# Altium PCB roTDSP.PcbDoc (part 2 of 2)
Units mm, origin at the board's own origin, x right, y up, seen from the top; angles counter-clockwise.
Board outline 100.2 x 100 mm, 2 copper layers (Top Layer, Bottom Layer); 148 components, 98 nets, 431 pads, 651 vias.
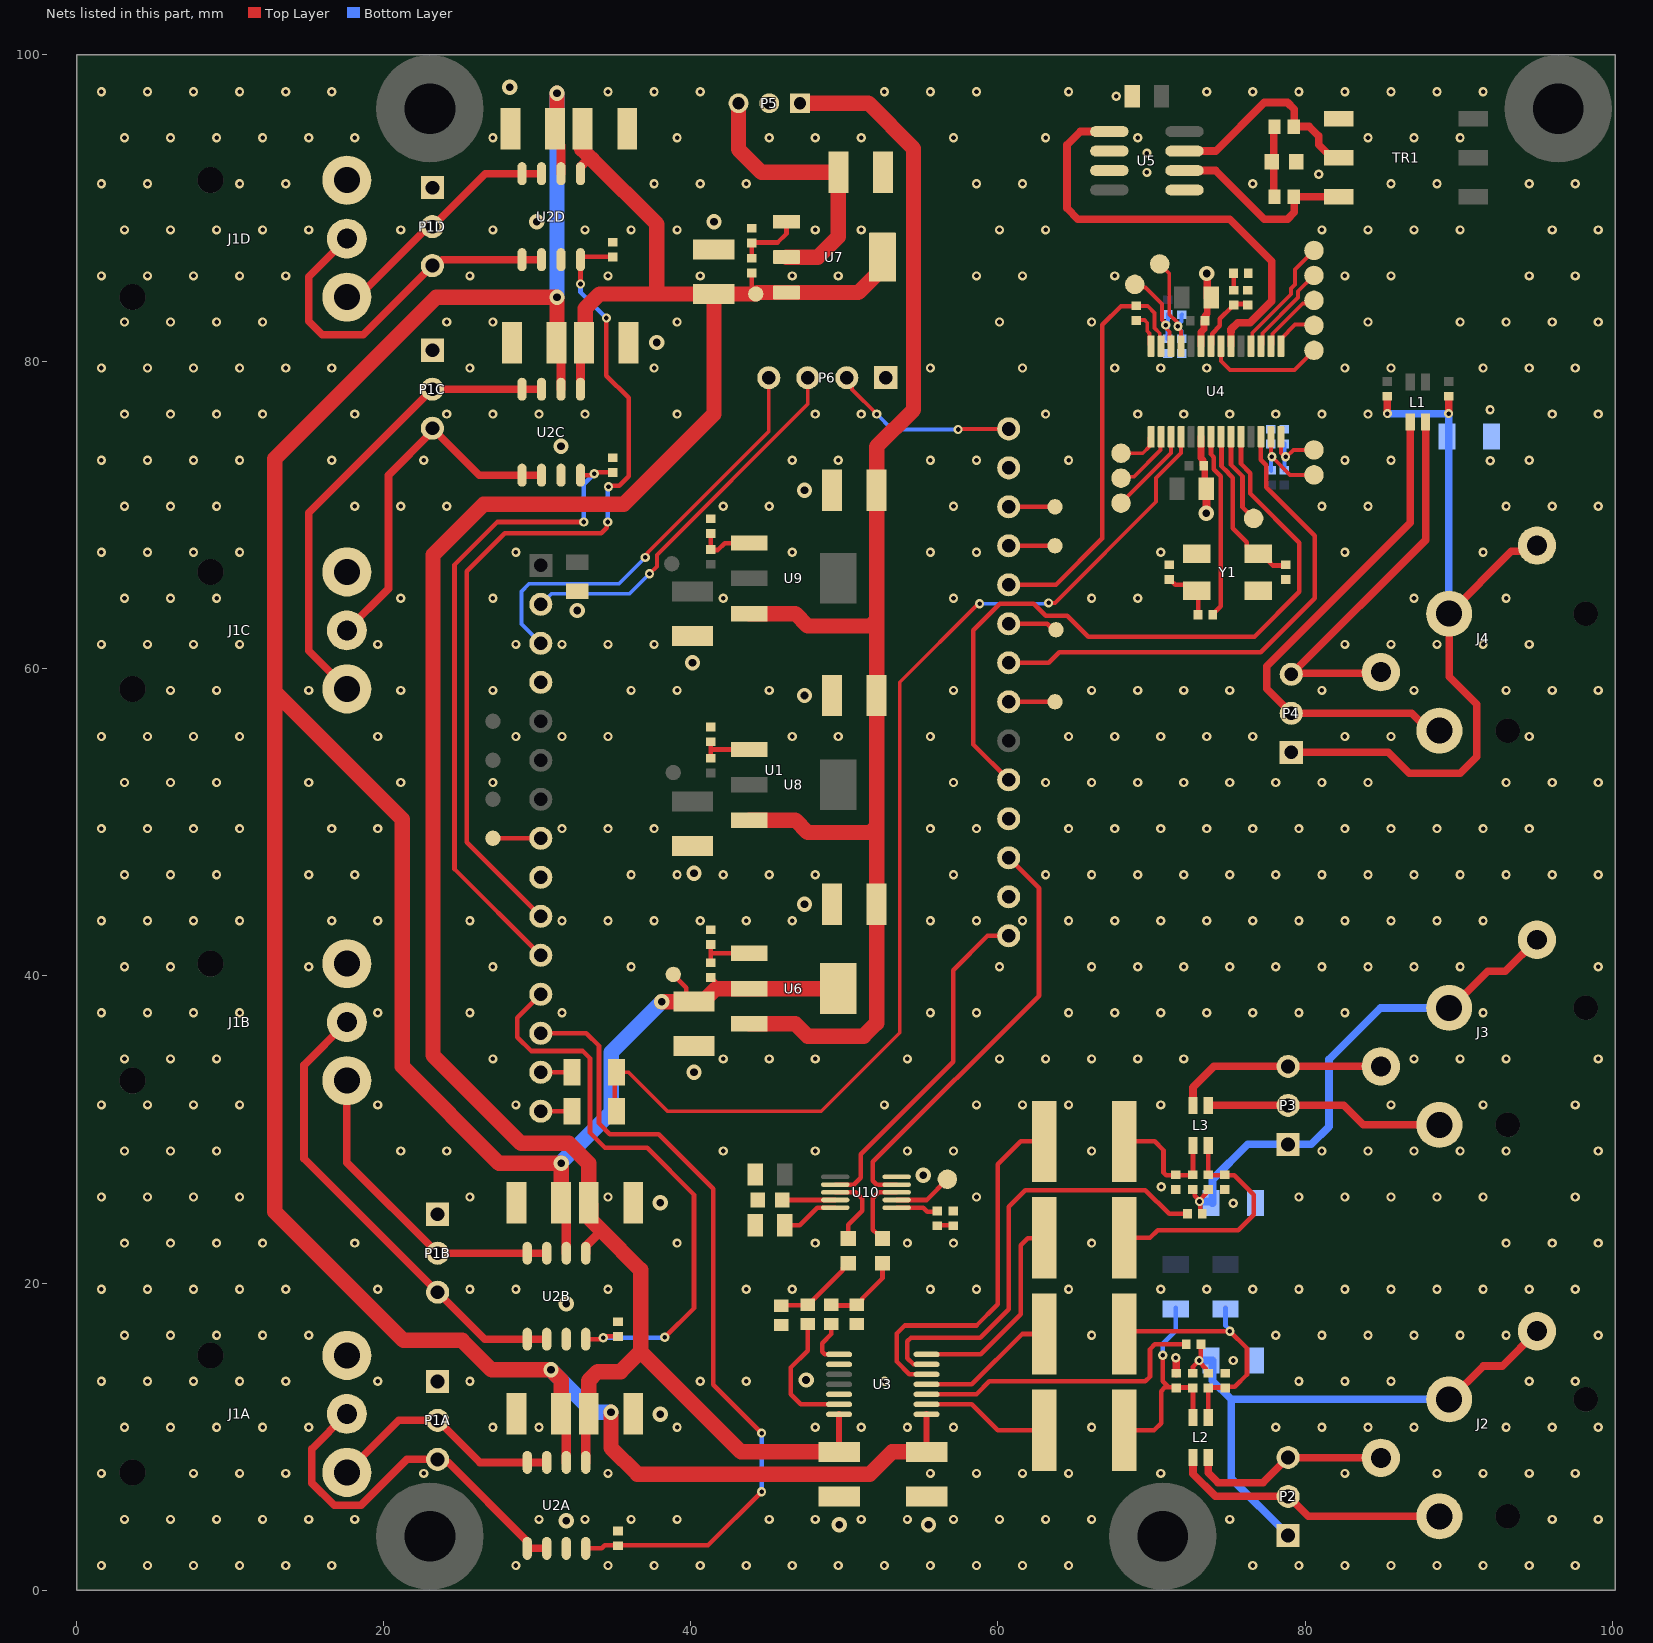
[diagram p2: the nets of this part, all layers, seen from the top]

## Via types
v1: diameter 0.6, hole 0.3, Top Layer to Bottom Layer, tented both sides, 613 vias
v2: diameter 1, hole 0.5, Top Layer to Bottom Layer, tented both sides, 38 vias

## Nets (pads, with @x,y where several pads share a name; then routed paths per layer and width w, separated by ;. In a path a pad name is that pad's centre, name@x,y a point inside that pad or via, vN(x,y) a via of type N, cw(c..) or ccw(c..) an arc to the next point about the centre after c; other vN are vias at no path point) (continued)
FMT0: R20.2 R21.1 TP3.1 U4.25 | length 7.8
  Top Layer w0.254: TP3.1@70.536,86.381 71.154,85.763 71.154,83.097 71.652,82.598 71.652,82.295 71.929,82.018 U4.25@71.929,81.03
  Bottom Layer w0.254: R21.1@71.959,81.471 71.959,82.013 71.718,82.255 v1(71.718,82.322) 71.718,82.416 71.943,82.641 71.943,83.068 R20.2@71.974,83.098
FMT1: R22.2 R23.1 TP4.1 U4.26 | length 7
  Top Layer w0.254: TP4.1@68.91,85.05 69.104,84.855 69.603,84.855 70.679,83.78 70.679,82.719 70.922,82.476 70.922,82.225 71.181,81.966 71.181,81.128 U4.26@71.279,81.03
  Bottom Layer w0.254: v1(70.922,82.397) 70.922,82.318 71.054,82.187 R23.1@71.054,81.48 ; v1@70.984,82.388 70.984,82.615 71.072,82.703 71.072,83.112 R22.2@71.068,83.115
GND: C1.1 C2A.1 C2B.1 C2C.1 C2D.1 C3A.1 C3B.1 C3C.1 C3D.1 C4.1 C7.1 C10.1 C11.1 C12.1 C13.1 C14.1 C15.1 C16.2 C17.2 C20.1 C21.1 C22.1 C23.1 C24.1 C25.1 C26.1 C27.1 C28.2 C29.1 C30.1 C31.1 C32.1 C33.1 C34.2 C35.1 C38.1 J1A.1 J1B.1 J1C.1 J1D.1 P1A.1 P1B.1 P1C.1 P1D.1 P5.2 P6.1 R1A.1 R1B.1 R1C.1 R1D.1 R4.1 R8.1 R15.1 R21.2 R23.2 R25.2 R27.2 R29.1 R31.1 R33.2 R35.2 R36.2 R39.1 R41.1 TR1.4 U1.4 U1.9 U1.17 U1.19 U1.28 U2A.3 U2B.3 U2C.3 U2D.3 U3.9 U3.12 U4.6 U4.23 U5.2 U5.3 U5.5 U10.10 Y1.2 Y1.4 | length 10.8
  Top Layer w0.45: U4.6@73.229,75.13 73.229,73.74 73.351,73.618 73.351,73.3 C16.2@73.411,73.24 ; U4.23@73.229,81.03 73.229,81.757 73.23,81.759 73.23,81.936 73.424,82.129 73.424,82.67 C17.2@73.444,82.69 ; C16.2@73.391,73.24 73.471,73.16 73.471,72.348 73.604,72.215 C15.1@73.604,71.74 ; 73.484,83 73.631,83.147 C14.1@73.631,84.19
  Top Layer w0.5: v1(71.581,15.131) 71.581,15.104 71.619,15.065 C23.1@71.619,14.12 C23.1@71.619,14.08 ; v2(73.558,70.152) 73.558,70.502 73.585,70.529 C15.1@73.585,71.722 ; v2(73.604,85.761) 73.604,85.411 73.631,85.384 C14.1@73.631,84.19
  other v1: 1.6,1.6 4.6,1.6 7.6,1.6 10.6,1.6 13.6,1.6 16.6,1.6 28.6,1.6 34.6,1.6 37.6,1.6 40.6,1.6 43.6,1.6 46.6,1.6 49.6,1.6 52.6,1.6 55.6,1.6 58.6,1.6 61.6,1.6 64.6,1.6 76.6,1.6 79.6,1.6 82.6,1.6 85.6,1.6 88.6,1.6 91.6,1.6 94.6,1.6 97.6,1.6 3.1,4.6 6.1,4.6 9.1,4.6 12.1,4.6 15.1,4.6 18.1,4.6 30.1,4.6 33.1,4.6 36.1,4.6 39.1,4.6 45.1,4.6 48.1,4.6 51.1,4.6 54.1,4.6 57.1,4.6 60.1,4.6 63.1,4.6 66.1,4.6 75.1,4.6 96.1,4.6 99.1,4.6 1.6,7.6 7.6,7.6 10.6,7.6 13.6,7.6 22.6,7.6 34.6,7.6 55.6,7.6 58.6,7.6 61.6,7.6 64.6,7.6 70.6,7.6 82.6,7.6 88.6,7.6 91.6,7.6 94.6,7.6 97.6,7.6 3.1,10.6 6.1,10.6 9.1,10.6 12.1,10.6 15.1,10.6 27.1,10.6 30.1,10.6 39.1,10.6 48.1,10.6 51.1,10.6 54.1,10.6 57.1,10.6 66.1,10.6 78.1,10.6 81.1,10.6 84.1,10.6 87.1,10.6 93.1,10.6 96.1,10.6 99.1,10.6 1.6,13.6 4.6,13.6 7.6,13.6 10.6,13.6 13.6,13.6 19.6,13.6 25.6,13.6 40.6,13.6 43.6,13.6 52.6,13.6 79.6,13.6 82.6,13.6 85.6,13.6 94.6,13.6 97.6,13.6 75.319,14.95 3.1,16.6 6.1,16.6 9.1,16.6 12.1,16.6 15.1,16.6 66.1,16.6 78.1,16.6 81.1,16.6 84.1,16.6 87.1,16.6 90.1,16.6 93.1,16.6 99.1,16.6 1.6,19.6 4.6,19.6 7.6,19.6 10.6,19.6 13.6,19.6 19.6,19.6 25.6,19.6 28.6,19.6 34.6,19.6 43.6,19.6 46.6,19.6 55.6,19.6 58.6,19.6 64.6,19.6 70.6,19.6 73.6,19.6 76.6,19.6 79.6,19.6 82.6,19.6 85.6,19.6 88.6,19.6 91.6,19.6 94.6,19.6 97.6,19.6 3.1,22.6 6.1,22.6 9.1,22.6 12.1,22.6 18.1,22.6 39.1,22.6 48.1,22.6 54.1,22.6 57.1,22.6 66.1,22.6 93.1,22.6 96.1,22.6 99.1,22.6 75.319,25.201 1.6,25.6 4.6,25.6 7.6,25.6 10.6,25.6 25.6,25.6 34.6,25.6 58.6,25.6 79.6,25.6 82.6,25.6 85.6,25.6 88.6,25.6 91.6,25.6 97.6,25.6 70.631,26.27 3.1,28.6 6.1,28.6 9.1,28.6 21.1,28.6 24.1,28.6 42.1,28.6 48.1,28.6 54.1,28.6 57.1,28.6 66.1,28.6 81.1,28.6 84.1,28.6 87.1,28.6 90.1,28.6 93.1,28.6 99.1,28.6 1.6,31.6 4.6,31.6 7.6,31.6 10.6,31.6 19.6,31.6 28.6,31.6 52.6,31.6 58.6,31.6 61.6,31.6 64.6,31.6 70.6,31.6 85.6,31.6 91.6,31.6 97.6,31.6 3.1,34.6 6.1,34.6 9.1,34.6 27.1,34.6 42.1,34.6 45.1,34.6 48.1,34.6 54.1,34.6 60.1,34.6 63.1,34.6 66.1,34.6 69.1,34.6 72.1,34.6 87.1,34.6 90.1,34.6 93.1,34.6 99.1,34.6 1.6,37.6 4.6,37.6 7.6,37.6 10.6,37.6 19.6,37.6 25.6,37.6 31.6,37.6 55.6,37.6 58.6,37.6 64.6,37.6 67.6,37.6 70.6,37.6 73.6,37.6 76.6,37.6 79.6,37.6 82.6,37.6 91.6,37.6 3.1,40.6 6.1,40.6 15.1,40.6 27.1,40.6 36.1,40.6 60.1,40.6 66.1,40.6 69.1,40.6 72.1,40.6 75.1,40.6 78.1,40.6 81.1,40.6 84.1,40.6 87.1,40.6 90.1,40.6 99.1,40.6 1.6,43.6 4.6,43.6 7.6,43.6 10.6,43.6 16.6,43.6 19.6,43.6 25.6,43.6 31.6,43.6 34.6,43.6 37.6,43.6 40.6,43.6 43.6,43.6 46.6,43.6 55.6,43.6 58.6,43.6 61.6,43.6 64.6,43.6 67.6,43.6 70.6,43.6 73.6,43.6 76.6,43.6 79.6,43.6 82.6,43.6 85.6,43.6 88.6,43.6 91.6,43.6 3.1,46.6 6.1,46.6 9.1,46.6 15.1,46.6 18.1,46.6 36.1,46.6 39.1,46.6 42.1,46.6 45.1,46.6 48.1,46.6 57.1,46.6 63.1,46.6 66.1,46.6 69.1,46.6 72.1,46.6 75.1,46.6 78.1,46.6 81.1,46.6 84.1,46.6 87.1,46.6 90.1,46.6 93.1,46.6 96.1,46.6 99.1,46.6 1.6,49.6 4.6,49.6 7.6,49.6 10.6,49.6 16.6,49.6 19.6,49.6 31.6,49.6 34.6,49.6 37.6,49.6 55.6,49.6 58.6,49.6 64.6,49.6 67.6,49.6 70.6,49.6 73.6,49.6 76.6,49.6 79.6,49.6 82.6,49.6 85.6,49.6 88.6,49.6 91.6,49.6 94.6,49.6 3.1,52.6 6.1,52.6 9.1,52.6 15.1,52.6 21.1,52.6 27.1,52.6 57.1,52.6 63.1,52.6 66.1,52.6 69.1,52.6 72.1,52.6 75.1,52.6 78.1,52.6 81.1,52.6 84.1,52.6 93.1,52.6 96.1,52.6 99.1,52.6 1.6,55.6 4.6,55.6 7.6,55.6 10.6,55.6 19.6,55.6 28.6,55.6 31.6,55.6 34.6,55.6 46.6,55.6 49.6,55.6 55.6,55.6 64.6,55.6 67.6,55.6 70.6,55.6 73.6,55.6 76.6,55.6 82.6,55.6 85.6,55.6 94.6,55.6 6.1,58.6 9.1,58.6 15.1,58.6 21.1,58.6 27.1,58.6 36.1,58.6 39.1,58.6 45.1,58.6 57.1,58.6 66.1,58.6 69.1,58.6 72.1,58.6 75.1,58.6 81.1,58.6 87.1,58.6 93.1,58.6 96.1,58.6 99.1,58.6 1.6,61.6 4.6,61.6 7.6,61.6 10.6,61.6 19.6,61.6 28.6,61.6 31.6,61.6 34.6,61.6 37.6,61.6 82.6,61.6 85.6,61.6 88.6,61.6 91.6,61.6 94.6,61.6 3.1,64.6 6.1,64.6 9.1,64.6 21.1,64.6 27.1,64.6 42.1,64.6 57.1,64.6 66.1,64.6 69.1,64.6 87.1,64.6 93.1,64.6 1.6,67.6 4.6,67.6 7.6,67.6 10.6,67.6 28.6,67.6 46.6,67.6 55.6,67.6 58.6,67.6 70.6,67.6 82.6,67.6 91.6,67.6 3.1,70.6 6.1,70.6 9.1,70.6 18.1,70.6 21.1,70.6 24.1,70.6 42.1,70.6 45.1,70.6 57.1,70.6 81.1,70.6 84.1,70.6 93.1,70.6 96.1,70.6 99.1,70.6 92.06,73.56 1.6,73.6 4.6,73.6 7.6,73.6 10.6,73.6 16.6,73.6 22.6,73.6 46.6,73.6 49.6,73.6 55.6,73.6 58.6,73.6 64.6,73.6 82.6,73.6 85.6,73.6 94.6,73.6 3.1,76.6 6.1,76.6 9.1,76.6 12.1,76.6 18.1,76.6 24.1,76.6 27.1,76.6 30.1,76.6 33.1,76.6 39.1,76.6 48.1,76.6 51.1,76.6 63.1,76.6 69.1,76.6 72.1,76.6 75.1,76.6 78.1,76.6 81.1,76.6 84.1,76.6 96.1,76.6 99.1,76.6 92.055,76.88 1.6,79.6 4.6,79.6 7.6,79.6 10.6,79.6 13.6,79.6 16.6,79.6 25.6,79.6 37.6,79.6 55.6,79.6 61.6,79.6 67.6,79.6 70.6,79.6 73.6,79.6 82.6,79.6 85.6,79.6 91.6,79.6 94.6,79.6 97.6,79.6 3.1,82.6 6.1,82.6 9.1,82.6 12.1,82.6 24.1,82.6 27.1,82.6 39.1,82.6 60.1,82.6 66.1,82.6 84.1,82.6 90.1,82.6 93.1,82.6 96.1,82.6 99.1,82.6 1.6,85.6 4.6,85.6 7.6,85.6 10.6,85.6 13.6,85.6 25.6,85.6 34.6,85.6 40.6,85.6 46.6,85.6 49.6,85.6 58.6,85.6 61.6,85.6 67.6,85.6 82.6,85.6 85.6,85.6 94.6,85.6 97.6,85.6 3.1,88.6 6.1,88.6 9.1,88.6 12.1,88.6 15.1,88.6 21.1,88.6 27.1,88.6 33.1,88.6 36.1,88.6 39.1,88.6 48.1,88.6 51.1,88.6 60.1,88.6 63.1,88.6 81.1,88.6 84.1,88.6 87.1,88.6 90.1,88.6 96.1,88.6 99.1,88.6 1.6,91.6 4.6,91.6 10.6,91.6 13.6,91.6 37.6,91.6 40.6,91.6 43.6,91.6 58.6,91.6 61.6,91.6 76.6,91.6 85.6,91.6 88.6,91.6 94.6,91.6 97.6,91.6 80.9,92.218 69.7,92.345 69.7,93.6 3.1,94.6 6.1,94.6 9.1,94.6 12.1,94.6 15.1,94.6 18.1,94.6 27.1,94.6 39.1,94.6 45.1,94.6 48.1,94.6 51.1,94.6 57.1,94.6 63.1,94.6 69.1,94.6 84.1,94.6 87.1,94.6 90.1,94.6 67.7,97.3 1.6,97.6 4.6,97.6 7.6,97.6 10.6,97.6 13.6,97.6 16.6,97.6 34.6,97.6 37.6,97.6 40.6,97.6 52.6,97.6 55.6,97.6 58.6,97.6 64.6,97.6 73.6,97.6 76.6,97.6 79.6,97.6 82.6,97.6 85.6,97.6 88.6,97.6 91.6,97.6
  other v2: 49.65,4.264 55.475,4.264 31.878,4.509 38,11.45 47.5,13.683 31.878,18.64 38,25.23 55.14,27.02 40.2,33.73 47.4,44.68 40.2,46.7 47.4,58.27 40.1,60.4 32.593,63.809 47.4,71.645 31.535,74.516 37.778,81.26 29.965,89.125 41.5,89.125 28.2,97.9
GPIO_1: TP14.1 U1.22 | length 3
  Top Layer w0.3: U1.22@60.7,57.86 TP14.1@63.714,57.86
GPIO_6: R10.2 U1.25 U4.27 | length 27.7
  Top Layer w0.254: R10.2@69,83.635 69.754,83.635 70.2,83.188 70.2,82.2 70.536,81.864 70.536,81.123 U4.27@70.629,81.03
  Top Layer w0.3: U1.25@60.7,65.48 63.78,65.48 66.8,68.5 66.8,82.421 68.014,83.635 R10.2@69,83.635
GPIO_7: TP17.1 U1.24 | length 3.2
  Top Layer w0.3: U1.24@60.7,62.94 63.2,62.94 63.59,62.55 TP17.1@63.78,62.55
GPIO_10: TP20.1 U1.26 | length 3
  Top Layer w0.3: U1.26@60.7,68.02 TP20.1@63.714,68.02
GPIO_11: TP21.1 U1.27 | length 3
  Top Layer w0.3: U1.27@60.7,70.56 TP21.1@63.714,70.56
Line_N: C6.1 C22.2 L2.4 R5.2 R17.1 | length 16.7
  Top Layer w0.3: C6.1@68.225,16.678 68.407,16.86 v1(75.109,16.86) 76.219,15.75 76.219,14.04 75.414,13.234 74.854,13.234 74.814,13.195 73.705,13.195 73.7,13.19 L2.4@73.7,11.24
  Bottom Layer w0.3: R17.1@74.819,18.4 74.819,17.231 75.109,16.941 v1(75.109,16.86)
Line_P: C5.1 C23.2 L2.3 R2.1 R16.1 | length 14.5
  Top Layer w0.3: C5.1@68.225,10.405 70.165,10.405 70.631,10.871 70.631,12.955 70.875,13.2 71.119,13.2 ; v1(70.731,15.296) 70.731,13.589 71.119,13.2 ; L2.3@72.7,11.24 72.7,13.19 72.695,13.195 71.624,13.195 71.619,13.2 71.119,13.2
  Bottom Layer w0.3: v1(70.731,15.296) 70.731,16.033 71.581,16.883 R16.1@71.581,18.4
LRCLK_in: U1.20 U4.10 | length 46.4
  Top Layer w0.3: U1.20@60.7,52.78 58.4,55.08 58.4,62.528 60.122,64.25 62.33,64.25 63.109,63.47 64.52,63.47 65.89,62.1 76.712,62.1 79.635,65.023 79.635,68.222 76.429,71.428 76.429,72.757 75.829,73.357 U4.10@75.829,75.13
NetC5_2: C5.2 U3.2 | length 8.4
  Top Layer w0.3: U3.2@55.35,12.1 58.3,12.1 59.995,10.405 C5.2@63.025,10.405
NetC6_2: C6.2 U3.4 | length 9
  Top Layer w0.3: U3.4@55.35,13.4 58.3,13.4 61.578,16.678 C6.2@63.025,16.678
NetC8_1: C8.1 C25.2 L3.3 R6.1 | length 15.8
  Top Layer w0.3: C8.1@68.225,22.95 69.9,22.95 70.4,23.45 75.66,23.45 76.669,24.459 76.669,25.742 75.401,27.01 74.781,27.01 74.776,27.015 73.705,27.015 73.7,27.02 L3.3@73.7,28.97
NetC8_2: C8.2 U3.7 | length 13.5
  Top Layer w0.3: U3.7@55.35,15.35 58.872,15.35 61.483,17.96 61.483,22.45 61.951,22.918 62.993,22.918 C8.2@63.025,22.95
NetC9_1: C9.1 C24.2 L3.4 R9.2 | length 8.2
  Top Layer w0.3: C9.1@68.225,29.222 70.208,29.222 70.781,28.65 70.781,27.186 70.956,27.01 71.581,27.01 71.586,27.015 72.695,27.015 72.7,27.02 L3.4@72.7,28.97
NetC9_2: C9.2 U3.5 | length 24.3
  Top Layer w0.3: U3.5@55.35,14.05 55.34,14.06 54.23,14.06 53.4,14.89 53.4,16.715 53.917,17.231 58.604,17.231 59.995,18.622 59.995,27.734 61.483,29.222 C9.2@63.025,29.222
NetC10_2: C10.2 U4.8 Y1.1 | length 11
  Top Layer w0.3: U4.8@74.529,75.13 74.561,75.098 74.561,73.21 75.004,72.767 75.004,72.758 75.304,72.458 75.304,69.154 76.207,68.25 76.207,67.95 76.657,67.5 77.257,67.5 77.632,67.125 77.632,67.004 77.896,66.74 C10.2@78.757,66.74
NetC11_2: C11.2 R11.1 Y1.3 | length 3.7
  Top Layer w0.3: C11.2@71.157,65.86 71.157,65.84 71.252,65.745 71.272,65.745 71.542,65.475 72.582,65.475 Y1.3@72.957,65.1 73.057,65 R11.1@73.057,63.541
NetC12_2: C12.2 R12.1 | length 1.2
  Top Layer w0.3: C12.2@75.328,85.781 75.348,85.761 75.348,84.66 R12.1@75.368,84.64
NetC13_2: C13.2 R12.2 U4.22 | length 4.2
  Top Layer w0.3: U4.22@73.879,81.03 73.954,81.105 73.954,81.846 74.457,82.35 74.457,82.799 75.208,83.55 75.208,83.575 75.343,83.71 R12.2@75.368,83.71 75.368,83.74 75.398,83.77 C13.2@76.238,83.77
NetC18_1: C18.1 C19.1 J4.1 J4.G P4.1 R15.2 | length 50.1
  Top Layer w0.5: P4.1@79.104,54.57 85.43,54.57 86.8,53.2 90.12,53.2 91.193,54.273 91.193,57.697 89.39,59.5 J4.1@89.39,63.6 93.447,67.657 94.727,67.657 J4.G@95.11,68.04 ; v1(85.365,76.63) C19.1@85.365,77.8 ; v1(89.355,76.63) C18.1@89.355,77.8
  Bottom Layer w0.5: v1(85.365,76.63) v1(89.355,76.63) 89.355,63.635 J4.1@89.39,63.6
NetC21_2: C21.2 R13.1 R14.1 | length 4.6
  Top Layer w0.5: R14.1@77.957,90.76 R13.1@77.957,95.33
NetC26_2: C26.2 C30.2 C32.2 P5.1 U6.3 U8.3 U9.3 | length 93.2
  Top Layer w1: U6.3@43.8,36.88 46.8,36.88 47.6,36.08 51.25,36.08 52.1,36.93 C26.2@52.1,44.68 52.1,49.74 ; U8.3@43.8,50.15 46.8,50.15 47.6,49.35 51.71,49.35 52.1,49.74 ; U9.3@43.8,63.6 46.8,63.6 47.6,62.8 51.71,62.8 52.1,63.19 ; P5.1@47.1,96.85 51.55,96.85 54.5,93.9 54.5,76.88 52.1,74.48 C32.2@52.1,71.645 52.1,63.19 ; 52.1,49.74 C30.2@52.1,58.27 52.1,63.19
NetC28_1: C28.1 P5.3 U7.2 | length 18.2
  Top Layer w1: P5.3@43.1,96.85 43.1,93.845 44.6,92.345 C28.1@49.6,92.345 49.6,88.16 48.265,86.825 U7.2@46.225,86.825
NetC35_2: C35.2 U10.5 | length 4
  Top Layer w0.3: C35.2@45.85,23.755 47.085,23.755 48.24,24.91 U10.5@49.4,24.91
NetC36_1: C36.1 R36.1 R37.2 | length 5.7
  Top Layer w0.3: R36.1@45.875,18.565 47.571,18.565 47.6,18.535 47.675,18.535 47.875,18.735 47.875,18.81 49.892,20.827 49.892,21 C36.1@50.242,21.35
NetC36_2: C36.2 U10.3 | length 4.9
  Top Layer w0.3: U10.3@49.4,25.91 50.725,25.91 51.15,25.485 51.15,24.71 50.242,23.802 C36.2@50.242,22.85
NetC37_1: C37.1 R38.2 R39.2 | length 5.1
  Top Layer w0.3: R38.2@49.15,18.535 50.7,18.535 50.8,18.635 50.875,18.635 51.175,18.935 51.175,19.01 52.475,20.31 C37.1@52.475,21.35
NetC37_2: C37.2 U10.8 | length 4.7
  Top Layer w0.3: C37.2@52.475,22.85 52.475,22.875 52.125,23.225 52.1,23.225 51.85,23.475 51.85,25.523 52.237,25.91 U10.8@53.4,25.91
NetC38_2: C38.2 U10.4 | length 3.5
  Top Layer w0.3: C38.2@45.9,25.41 U10.4@49.4,25.41
NetJ1A_2: J1A.2 P1A.2 U2A.7 U2A.8 | length 15.6
  Top Layer w0.5: J1A.2@17.588,7.663 20.978,11.053 P1A.2@23.5,11.053 26.239,8.314 U2A.8@29.338,8.314 U2A.7@30.608,8.314
NetJ1A_3: J1A.3 P1A.3 U2A.1 U2A.2 | length 25.3
  Top Layer w0.5: J1A.3@17.588,11.473 15.3,9.185 15.3,6.975 16.761,5.514 18.507,5.514 21.506,8.513 P1A.3@23.5,8.513 23.691,8.322 24.18,8.322 29.338,3.164 U2A.1@29.338,2.714 U2A.2@30.608,2.714
NetJ1B_2: J1B.2 P1B.2 U2B.7 U2B.8 | length 20.8
  Top Layer w0.5: J1B.2@17.588,33.181 17.588,27.852 P1B.2@23.5,21.94 U2B.8@29.338,21.94 U2B.7@30.608,21.94
NetJ1B_3: J1B.3 P1B.3 U2B.1 U2B.2 | length 30.7
  Top Layer w0.5: J1B.3@17.588,36.991 14.8,34.203 14.8,28.1 P1B.3@23.5,19.4 26.56,16.34 U2B.1@29.338,16.34 U2B.2@30.608,16.34
NetJ1C_2: J1C.2 P1C.2 U2C.7 U2C.8 | length 31
  Top Layer w0.5: J1C.2@17.588,58.699 15.1,61.187 15.1,70.163 P1C.2@23.157,78.22 U2C.8@28.995,78.22 U2C.7@30.265,78.22
NetJ1C_3: J1C.3 P1C.3 U2C.1 U2C.2 | length 23.9
  Top Layer w0.5: J1C.3@17.588,62.509 20.3,65.221 20.3,72.616 23.157,75.473 P1C.3@23.157,75.68 26.217,72.62 U2C.1@28.995,72.62 U2C.2@30.265,72.62
NetJ1D_2: J1D.2 P1D.2 U2D.7 U2D.8 | length 16
  Top Layer w0.5: J1D.2@17.588,84.217 18.293,84.217 22.886,88.81 P1D.2@23.157,88.81 26.607,92.26 U2D.8@28.995,92.26 U2D.7@30.265,92.26
NetJ1D_3: J1D.3 P1D.3 U2D.1 U2D.2 | length 24
  Top Layer w0.5: J1D.3@17.588,88.027 15.1,85.539 15.1,82.648 15.988,81.76 18.647,81.76 P1D.3@23.157,86.27 23.428,86.27 23.818,86.66 U2D.1@28.995,86.66 U2D.2@30.265,86.66
NetJ2_1: J2.1 J2.G P2.1 R2.2 R3.1 R4.2 R5.1 | length 39.3
  Top Layer w0.3: R2.2@72.7,14.09 72.7,14.54 v1@73.098,14.938 ; R3.1@73.198,16 73.198,15.131 73.098,15.031 v1(73.098,14.95) v1@73.098,14.938 ; R5.1@73.7,14.09 73.575,14.215 73.575,14.392 73.098,14.869 v1@73.098,14.938
  Top Layer w0.5: J2.1@89.39,12.42 89.44,12.42 91.61,14.59 92.84,14.59 J2.G@95.11,16.86
  Bottom Layer w0.5: v1(73.098,14.95) 73.969,14.95 73.969,13.646 75.195,12.42 ; P2.1@78.9,3.56 75.195,7.265 75.195,12.42 ; J2.1@89.39,12.42 75.195,12.42
NetJ2_2: J2.2 L2.2 P2.2 | length 18.3
  Top Layer w0.5: L2.2@72.7,8.64 72.7,7.569 74.169,6.1 P2.2@78.9,6.1 80.2,4.8 J2.2@88.755,4.8
NetJ2_3: J2.3 L2.1 P2.3 | length 13.2
  Top Layer w0.5: L2.1@73.704,8.64 73.704,7.632 74.336,7 77.26,7 P2.3@78.9,8.64 78.915,8.625 84.925,8.625 J2.3@84.94,8.61
NetJ3_1: J3.1 J3.G P3.1 R6.2 R7.1 R8.2 R9.1 | length 35.4
  Top Layer w0.3: R9.1@72.7,26.12 72.825,25.995 72.825,25.691 v1@73.128,25.388 ; R7.1@73.273,24.5 73.185,24.588 73.185,25.25 v1(73.128,25.307) v1@73.128,25.388 ; R6.2@73.7,26.12 73.575,25.995 73.575,25.835 v1@73.128,25.388
  Top Layer w0.5: J3.1@89.39,37.92 89.52,37.92 91.9,40.3 93.05,40.3 J3.G@95.11,42.36
  Bottom Layer w0.5: v1(73.128,25.307) 73.864,25.307 73.969,25.201 73.975,25.207 73.975,26.745 76.26,29.03 P3.1@78.9,29.03 80.4,29.03 81.567,30.197 81.567,34.567 84.92,37.92 J3.1@89.39,37.92
NetJ3_2: J3.2 L3.2 P3.2 | length 15.6
  Top Layer w0.5: L3.2@73.7,31.57 P3.2@78.9,31.57 82.532,31.57 83.802,30.3 J3.2@88.755,30.3
NetJ3_3: J3.3 L3.1 P3.3 | length 14
  Top Layer w0.5: L3.1@72.7,31.57 72.7,32.737 74.073,34.11 P3.3@78.9,34.11 J3.3@84.94,34.11
NetJ4_2: J4.2 L1.2 P4.2 | length 33.6
  Top Layer w0.5: L1.2@86.855,76.08 86.855,69.532 77.504,60.18 77.504,58.71 P4.2@79.104,57.11 86.949,57.11 88.079,55.98 J4.2@88.755,55.98
NetJ4_3: J4.3 L1.1 P4.3 | length 25.9
  Top Layer w0.5: P4.3@79.104,59.65 P4.3@79.174,59.72 ; J4.3@84.94,59.79 84.87,59.72 P4.3@79.174,59.72 ; L1.1@87.855,76.08 87.855,68.401 P4.3@79.174,59.72
NetP6_2: P6.2 U1.29 | length 12.2
  Top Layer w0.254: P6.2@50.15,78.97 50.15,78.633 50.486,78.297 50.486,78.215 v1(52.1,76.601) ; v1(57.4,75.6) 57.44,75.64 U1.29@60.7,75.64
  Bottom Layer w0.254: v1(52.1,76.601) 53.101,75.6 v1(57.4,75.6)
NetP6_3: P6.3 U1.2 | length 24.9
  Top Layer w0.254: v1(37.3,66.2) 37.778,66.678 37.778,67.426 47.61,77.259 P6.3@47.61,78.97
  Bottom Layer w0.254: U1.2@30.22,64.21 30.229,64.21 30.919,64.9 36,64.9 v1(37.3,66.2)
NetP6_4: P6.4 U1.3 | length 27.9
  Top Layer w0.254: v1(37.023,67.264) 37.023,67.357 37.171,67.505 37.171,67.571 45.07,75.47 P6.4@45.07,78.97
  Bottom Layer w0.254: U1.3@30.22,61.67 28.95,62.94 28.95,65.05 29.45,65.55 35.31,65.55 v1(37.023,67.264)
NetR3_2: R3.2 U3.3 | length 19.3
  Top Layer w0.3: U3.3@55.35,12.75 58.6,12.75 59.439,13.589 69.6,13.589 69.9,13.889 69.9,15.685 70.215,16 R3.2@72.298,16
NetR7_2: R7.2 U3.6 | length 29.4
  Top Layer w0.3: U3.6@55.35,14.7 55.34,14.71 54.497,14.71 54.096,15.11 54.096,16.2 54.336,16.44 58.84,16.44 60.7,18.3 60.7,24.97 61.782,26.051 69.6,26.051 71.151,24.5 R7.2@72.373,24.5
NetR10_1: R10.1 U4.28 | length 2.4
  Top Layer w0.254: R10.1@69,82.735 69.539,82.735 69.723,82.55 69.723,82.002 69.881,81.845 69.881,81.128 U4.28@69.979,81.03
NetR11_2: R11.2 U4.7 | length 12.1
  Top Layer w0.3: U4.7@73.879,75.13 73.879,73.98 74.061,73.798 74.061,73.003 74.504,72.56 74.504,72.551 74.506,72.548 74.506,64.09 R11.2@73.957,63.541
NetR13_2: R13.2 TR1.5 U5.7 | length 13.7
  Top Layer w0.5: U5.7@72.15,93.735 74.181,93.735 77.346,96.9 78.859,96.9 79.307,96.452 R13.2@79.307,95.44 ; R13.2@79.307,95.33 80.282,95.33 80.9,94.712 80.9,94.155 81.755,93.3 TR1.5@82.2,93.3
NetR14_2: R14.2 TR1.6 U5.6 | length 12.6
  Top Layer w0.5: U5.6@72.15,92.465 74.181,92.465 77.346,89.3 78.859,89.3 79.307,89.748 79.307,90.76 TR1.6@82.2,90.76
NetR18_1: R18.1 U1.14 | length 2.1
  Top Layer w0.3: U1.14@30.22,33.73 R18.1@32.343,33.73
NetR18_2: R18.2 R19.2 U4.4 | length 73.6
  Top Layer w0.254: R18.2@35.043,33.73 35.943,33.73 38.483,31.19 48.486,31.19 53.6,36.304 53.6,59.13 58.72,64.25 v1(58.8,64.25) ; v1(63.3,64.3) 63.714,64.3 70.304,70.89 70.304,72.446 71.929,74.071 U4.4@71.929,75.13
  Top Layer w0.3: R19.2@35.043,31.19 R18.2@35.043,33.73
  Bottom Layer w0.254: v1(58.8,64.25) 63.25,64.25 v1(63.3,64.3)
NetR19_1: R19.1 U1.15 | length 2.1
  Top Layer w0.3: U1.15@30.22,31.19 R19.1@32.343,31.19
NetR28_1: R28.1 R29.2 U6.1 | length 3.8
  Top Layer w0.3: R28.1@41.3,40.829 41.3,41.455 ; R29.2@41.3,42.08 41.3,41.455 ; U6.1@43.8,41.48 41.325,41.48 41.3,41.455
NetR30_1: R30.1 R31.2 U7.1 | length 4.3
  Top Layer w0.3: R30.1@43.95,86.725 43.95,87.775 45.64,87.775 46.225,88.36 U7.1@46.225,89.125
NetR32_1: R32.1 R33.1 U8.1 | length 3.7
  Top Layer w0.3: R32.1@41.3,54.15 41.3,54.84 ; R33.1@41.3,55.29 41.3,54.84 ; U8.1@43.8,54.75 41.39,54.75 41.3,54.84
NetR34_1: R34.1 R35.1 U9.1 | length 3.8
  Top Layer w0.3: R35.1@41.3,68.85 41.3,67.75 41.75,67.75 42.2,68.2 U9.1@43.8,68.2
NetR37_1: R37.1 U3.13 | length 8.5
  Top Layer w0.3: R37.1@47.6,17.385 47.6,15.6 46.5,14.5 46.5,12.75 47.15,12.1 U3.13@49.65,12.1
NetR38_1: R38.1 U3.8 | length 3.3
  Top Layer w0.3: R38.1@49.15,17.385 49.15,16.678 48.55,16.078 48.55,15.526 48.726,15.35 U3.8@49.65,15.35
NetR40_1: R40.1 R41.2 | length 1
  Top Layer w0.3: R40.1@56.05,23.755 R41.2@57.075,23.755
NetR40_2: R40.2 U10.6 | length 2.8
  Top Layer w0.3: U10.6@53.4,24.91 55.14,24.91 55.395,24.655 R40.2@56.05,24.655
NetTP1_1: TP1.1 U4.2 | length 4.2
  Top Layer w0.254: TP1.1@68.014,72.423 68.107,72.517 68.849,72.517 70.582,74.25 70.582,75.084 U4.2@70.629,75.13
NetTP2_1: TP2.1 U4.3 | length 5.7
  Top Layer w0.254: TP2.1@68.014,70.798 71.279,74.063 U4.3@71.279,75.13
NetTP5_1: TP5.1 U4.9 | length 5.9
  Top Layer w0.3: U4.9@75.179,75.13 75.179,73.3 75.929,72.55 75.929,70.535 TP5.1@76.654,69.81
NetTP8_1: TP8.1 U4.15 | length 3
  Top Layer w0.254: U4.15@78.429,81.03 78.429,81.505 79.353,82.43 80.535,82.43 TP8.1@80.584,82.381
NetTP9_1: TP9.1 U4.16 | length 4.5
  Top Layer w0.254: U4.16@77.779,81.03 77.877,81.128 77.877,81.837 79.852,83.812 80.39,83.812 TP9.1@80.584,84.007
NetTP10_1: TP10.1 U4.18 | length 7.9
  Top Layer w0.254: U4.18@76.479,81.03 76.56,81.111 76.56,81.876 79.089,84.406 79.089,84.789 79.354,85.053 79.354,86.028 TP10.1@80.584,87.259
NetTP11_1: TP11.1 U4.21 | length 7.8
  Top Layer w0.254: U4.21@74.529,81.03 74.529,80.055 75.104,79.48 79.309,79.48 TP11.1@80.584,80.755
NetTP12_1: TP12.1 U4.17 | length 6
  Top Layer w0.254: U4.17@77.129,81.03 77.221,81.123 77.221,81.865 79.543,84.187 79.543,84.601 80.575,85.633 TP12.1@80.584,85.633
NetTP13_1: TP13.1 U4.1 | length 2.7
  Top Layer w0.254: TP13.1@68.014,74.049 69.429,74.049 69.881,74.501 69.881,75.032 U4.1@69.979,75.13
NetTP26_1: TP26.1 U10.7 | length 3.9
  Top Layer w0.3: U10.7@53.4,25.41 55.35,25.41 TP26.1@56.7,26.76
NetU1_10: R1D.2 U1.10 U2D.4 | length 56.7
  Top Layer w0.3: U1.10@30.22,43.89 25.4,48.71 25.4,66.354 27.876,68.829 34.159,68.829 34.519,69.189 34.519,69.515 v1(34.576,69.573) ; v1(32.805,85.075) U2D.4@32.805,86.66 32.805,86.721 32.944,86.86 R1D.2@34.905,86.86 ; v1(34.494,82.86) 34.494,79.106 35.944,77.656 35.944,72.546 35.326,71.928 34.687,71.928 v1(34.63,71.87)
  Bottom Layer w0.3: v1(32.805,85.075) 32.805,84.549 v1(34.494,82.86) ; v1(34.576,69.573) 34.576,71.816 v1(34.63,71.87)
NetU1_11: R1C.2 U1.11 U2C.4 | length 42.9
  Top Layer w0.3: U1.11@30.22,41.35 24.6,46.97 24.6,66.783 27.392,69.575 v1(33.017,69.575) ; U2C.4@32.805,72.62 33.6,72.62 v1(33.7,72.721) 33.8,72.821 R1C.2@34.905,72.821
  Bottom Layer w0.3: v1(33.017,69.575) 33.017,72.037 v1(33.7,72.721)
NetU1_12: R1B.2 U1.12 U2B.4 | length 38.3
  Top Layer w0.3: U1.12@30.22,38.81 28.696,37.286 28.696,36.005 29.585,35.116 32.949,35.116 33.424,34.641 33.424,29.776 34.4,28.8 37.143,28.8 40.2,25.743 40.2,18.365 v1(38.3,16.465) ; U2B.4@33.148,16.34 34.193,16.34 v1(34.293,16.44) 34.393,16.54 R1B.2@35.248,16.54
  Bottom Layer w0.3: v1(34.293,16.44) 38.275,16.44 v1(38.3,16.465)
NetU1_13: R1A.2 U1.13 U2A.4 | length 52.4
  Top Layer w0.3: U1.13@30.22,36.27 33.193,36.27 34.009,35.454 34.009,30.403 34.712,29.7 37.9,29.7 41.45,26.15 41.45,13.373 v1(44.6,10.223) ; U2A.4@33.148,2.714 34.193,2.714 34.393,2.914 35.248,2.914 41.114,2.914 v1(44.6,6.4)
  Bottom Layer w0.3: v1(44.6,6.4) v1(44.6,10.223)
NetU1_16: U1.16 U10.2 | length 22.4
  Top Layer w0.3: U10.2@49.4,26.41 50.607,26.41 51.05,26.853 51.05,28.396 57.075,34.421 57.075,40.379 59.316,42.62 U1.16@60.7,42.62
NetU1_18: U1.18 U10.9 | length 28
  Top Layer w0.3: U10.9@53.4,26.41 52.112,26.41 51.85,26.672 51.85,27.896 62.675,38.721 62.675,45.725 U1.18@60.7,47.7
NetU4_20: U4.20 U5.1 | length 29.1
  Top Layer w0.45: U4.20@75.179,81.03 75.179,81.98
  Top Layer w0.5: U5.1@67.25,95.005 65.35,95.005 64.5,94.155 64.5,90 65.2,89.3 75.1,89.3 77.834,86.566 77.834,83.967 76.418,82.55 75.614,82.55 75.179,82.115 75.179,81.98
Onboard_led: TP15.1 U1.8 | length 3.1
  Top Layer w0.3: TP15.1@27.1,48.97 U1.8@30.22,48.97
PSCK0: R24.2 R25.1 TP6.1 U4.13 | length 6.3
  Top Layer w0.254: U4.13@77.779,75.13 77.779,73.887 v1(77.843,73.822) 79.025,72.64 TP6.1@80.584,72.64
  Bottom Layer w0.254: R25.1@77.779,74.68 77.781,74.678 77.781,73.884 v1(77.843,73.822) ; v1@77.793,73.754 77.793,72.915 R24.2@77.802,72.906
PSCK1: R26.2 R27.1 TP7.1 U4.14 | length 5.4
  Top Layer w0.254: U4.14@78.429,75.13 78.429,74.049 78.659,73.819 v1(78.733,73.819) 78.802,73.819 79.249,74.266 TP7.1@80.584,74.266
  Bottom Layer w0.254: R26.2@78.654,72.915 v1@78.654,73.819 ; R27.1@78.654,74.68 v1@78.654,73.819 ; v1(78.733,73.819) v1@78.654,73.819
SDATA_in0: U1.23 U4.12 | length 33.7
  Top Layer w0.3: U1.23@60.7,60.4 63.3,60.4 64,61.1 77.126,61.1 80.635,64.609 80.635,68.672 80.403,68.904 77.482,71.825 77.482,73.264 77.129,73.617 U4.12@77.129,75.13
VCC: C2A.2 C2B.2 C2C.2 C2D.2 C4.2 C27.2 R28.2 TP24.1 U2A.6 U2B.6 U2C.6 U2D.6 U3.1 U6.2 U6.4 | length 232.4
  Top Layer w0.3: TP24.1@38.85,40.104 38.85,40.08 39.7,39.23 39.7,38.83 C27.2@40.2,38.33 ; R28.2@41.3,39.929 42.05,39.18
  Top Layer w0.4: C4.2@55.35,9 U3.1@55.35,11.45
  Top Layer w0.6: C2D.2@31.15,95.2 31.15,94.5 31.535,94.115 U2D.6@31.535,92.26 ; C2C.2@31.244,81.26 31.535,80.969 U2C.6@31.535,78.22 ; C2A.2@31.543,11.473 31.878,11.138 U2A.6@31.878,8.314 ; C2B.2@31.543,25.23 31.878,24.895 U2B.6@31.878,21.94
  Top Layer w1: C2D.2@31.15,95.2 31.275,95.325 v2(31.275,97.5) ; C2C.2@31.235,81.269 C2C.2@31.244,81.26 ; C2C.2@31.275,81.265 v2(31.275,84.217) 23.417,84.217 12.9,73.7 12.9,58.5 ; C2A.2@31.543,11.473 31.543,13.683 v2(30.883,14.343) 27.022,14.343 25.1,16.265 21.273,16.265 12.9,24.638 12.9,58.5 ; C2B.2@31.543,25.23 v2(31.543,27.8) 27.5,27.8 21.2,34.1 21.2,50.2 12.9,58.5 ; v2(34.793,11.574) 34.793,9.263 36.506,7.55 51.65,7.55 53.1,9 C4.2@55.35,9 ; v2(38.1,38.33) C27.2@40.2,38.33 40.9,38.33 41.05,38.48 41.05,38.594 41.636,39.18 42.05,39.18 U6.2@43.8,39.18 U6.4@49.6,39.18
  Bottom Layer w1: v2(30.883,14.343) 33.652,11.574 v2(34.793,11.574) ; v2(31.275,84.217) v2(31.275,97.5) ; v2(31.543,27.8) 31.543,27.843 34.8,31.1 34.8,35.03 v2(38.1,38.33)
VEE: C3A.2 C3B.2 C3C.2 C3D.2 C7.2 C29.2 R30.2 TP25.1 U2A.5 U2B.5 U2C.5 U2D.5 U3.14 U7.3 U7.4 | length 159.9
  Top Layer w0.3: R30.2@43.95,85.825 43.95,84.955 43.98,84.924 43.98,84.859 44.225,84.615 TP25.1@44.225,84.425
  Top Layer w0.4: C7.2@49.65,9 U3.14@49.65,11.45
  Top Layer w0.6: U2C.5@32.805,78.22 32.805,81.021 C3C.2@33.044,81.26 ; U2D.5@32.805,92.26 32.805,92.71 33.286,93.191 33.563,93.191 ; U2A.5@33.148,8.314 33.148,11.278 C3A.2@33.343,11.473 ; U2B.5@33.148,21.94 33.148,22.39 34.158,23.4 34.193,23.4
  Top Layer w1: C3D.2@32.896,94.001 32.896,93.858 33.563,93.191 37.778,88.976 37.778,84.425 ; C3C.2@33.044,81.26 33.105,81.321 33.105,83.475 34.055,84.425 37.778,84.425 ; C3A.2@33.343,11.473 33.343,13.639 33.929,14.225 35.418,14.225 36.729,15.536 ; C7.2@49.65,9 43.265,9 36.729,15.536 ; U7.4@52.475,86.825 52.475,86.1 50.9,84.525 U7.3@46.225,84.525 44.325,84.525 TP25.1@44.225,84.425 43.98,84.425 C29.2@41.5,84.425 ; 36.729,15.536 36.729,20.864 34.193,23.4 33.493,24.1 33.493,25.08 C3B.2@33.343,25.23 33.343,27.8 32.043,29.1 28.936,29.1 23.2,34.836 23.2,67.429 26.488,70.717 35.615,70.717 41.5,76.601 C29.2@41.5,84.425 ; 37.778,84.425 C29.2@41.5,84.425
pads on no net: J1A.0 J1B.0 J1C.0 J1D.0 J2.4 J3.4 J4.4 TR1.3 U3.10 U3.11 U4.19 U5.4

## Polygon pours and split planes (outlines as drawn)
GND on Bottom Layer "GND_L02_P000" (solid, pour order 0): 0,0 100,0 100,100 0,100
GND on Top Layer "GND_L01_P001" (solid, pour order 1): 0,0 100,0 100,100 0,100

## Other copper
Top Layer:
  region net VEE: 33.51,93.41

## Silkscreen, mask and mechanical layers (free items; w line width, h text height)
Top Overlay:
  text "Output" at 20.566,55.3 h2 r270
Top Solder:
  text "roTDSP R1" at 66.725,39.9 h2 r90